# Altium PCB PCB1.pcbdoc
Units mil, origin at the board's own origin, x right, y up, seen from the top; angles counter-clockwise.
Board outline 6220 x 5760 mil, 2 copper layers (Top Layer, Bottom Layer); 105 components, 72 nets, 372 pads, 72 vias.
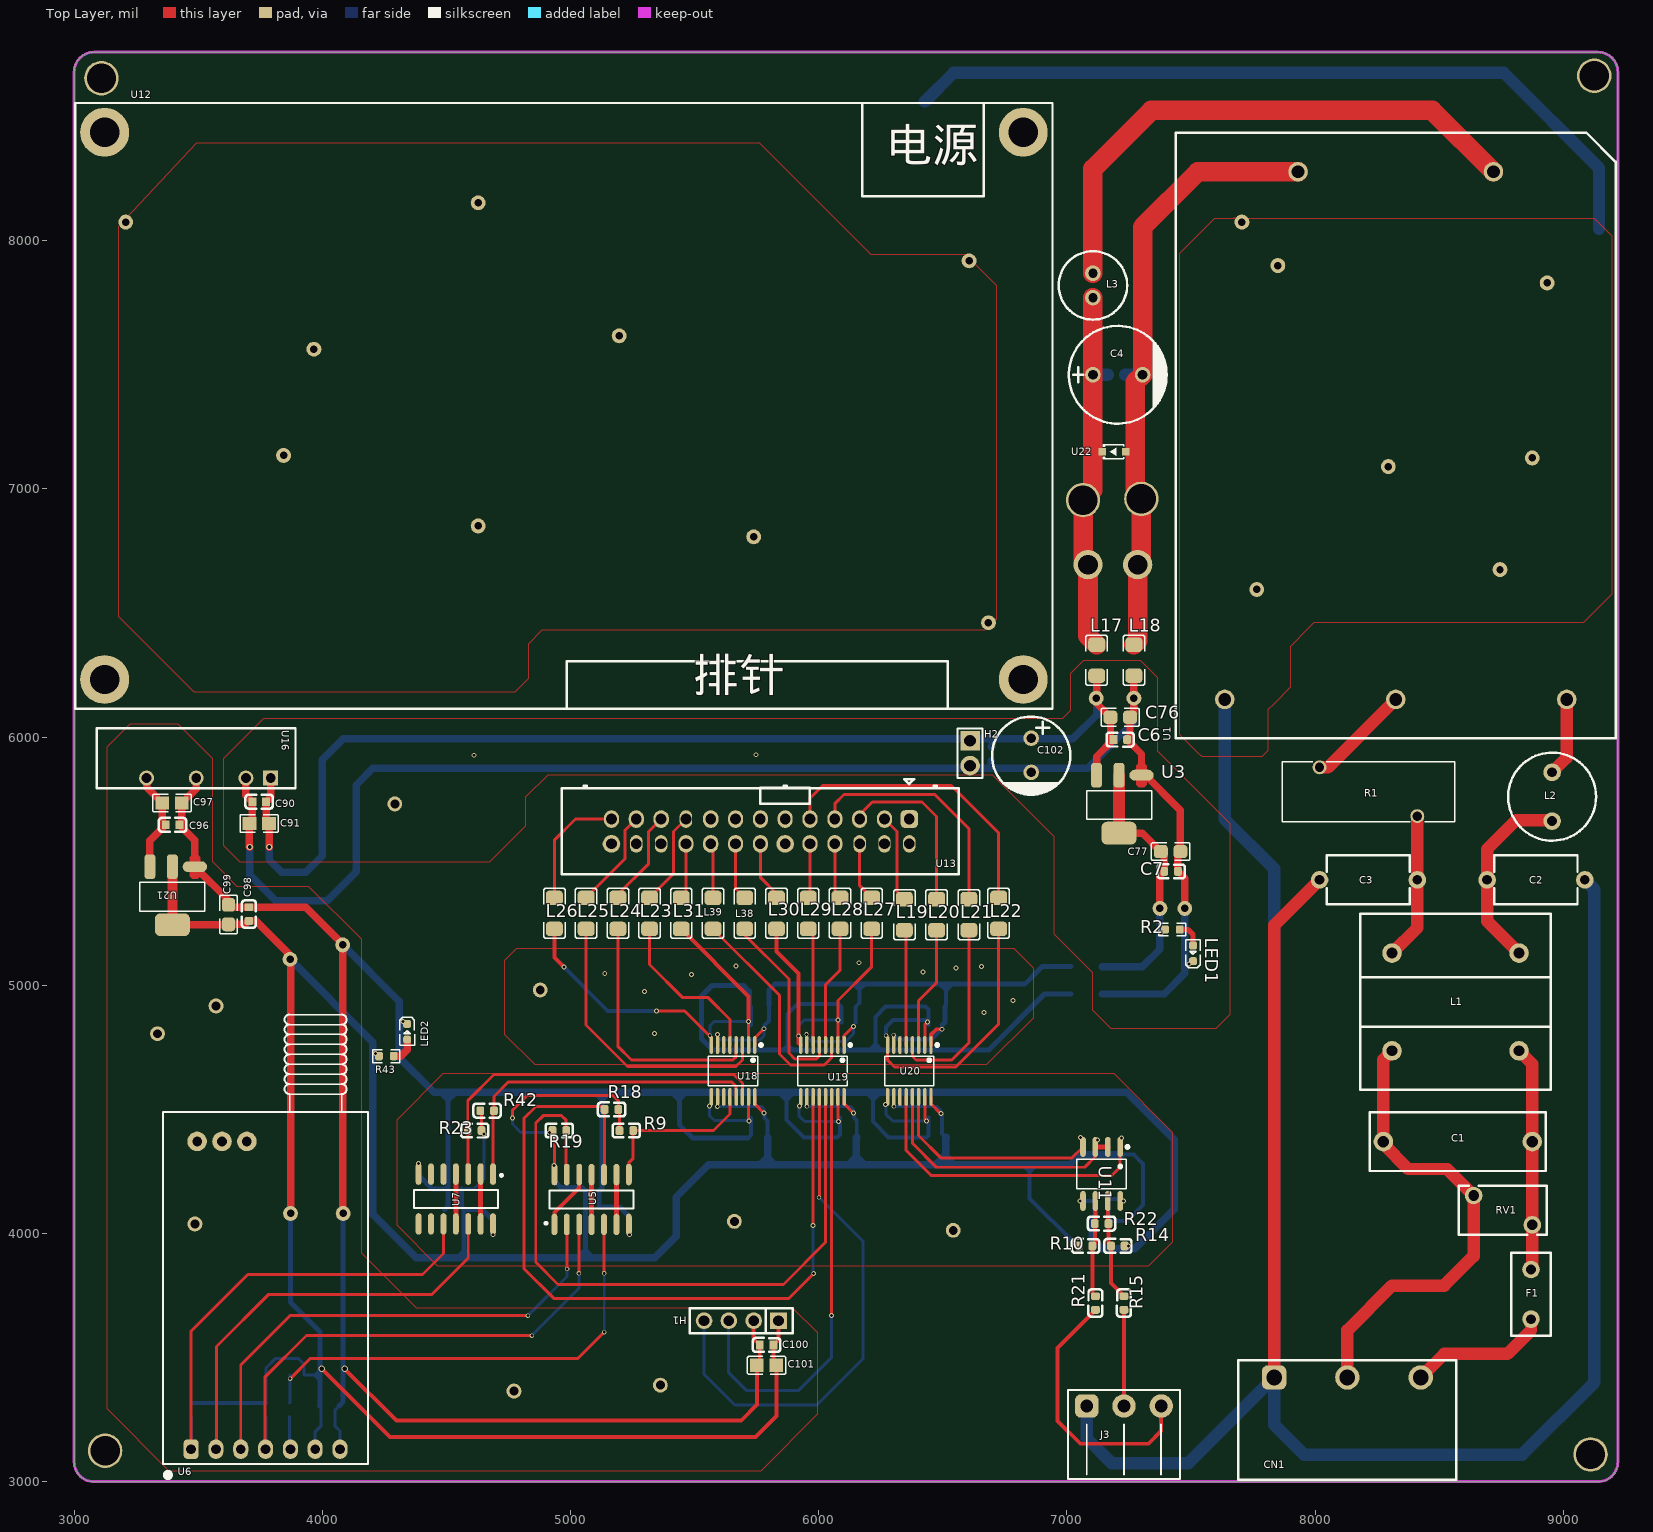
[diagram p0: Top Layer view]
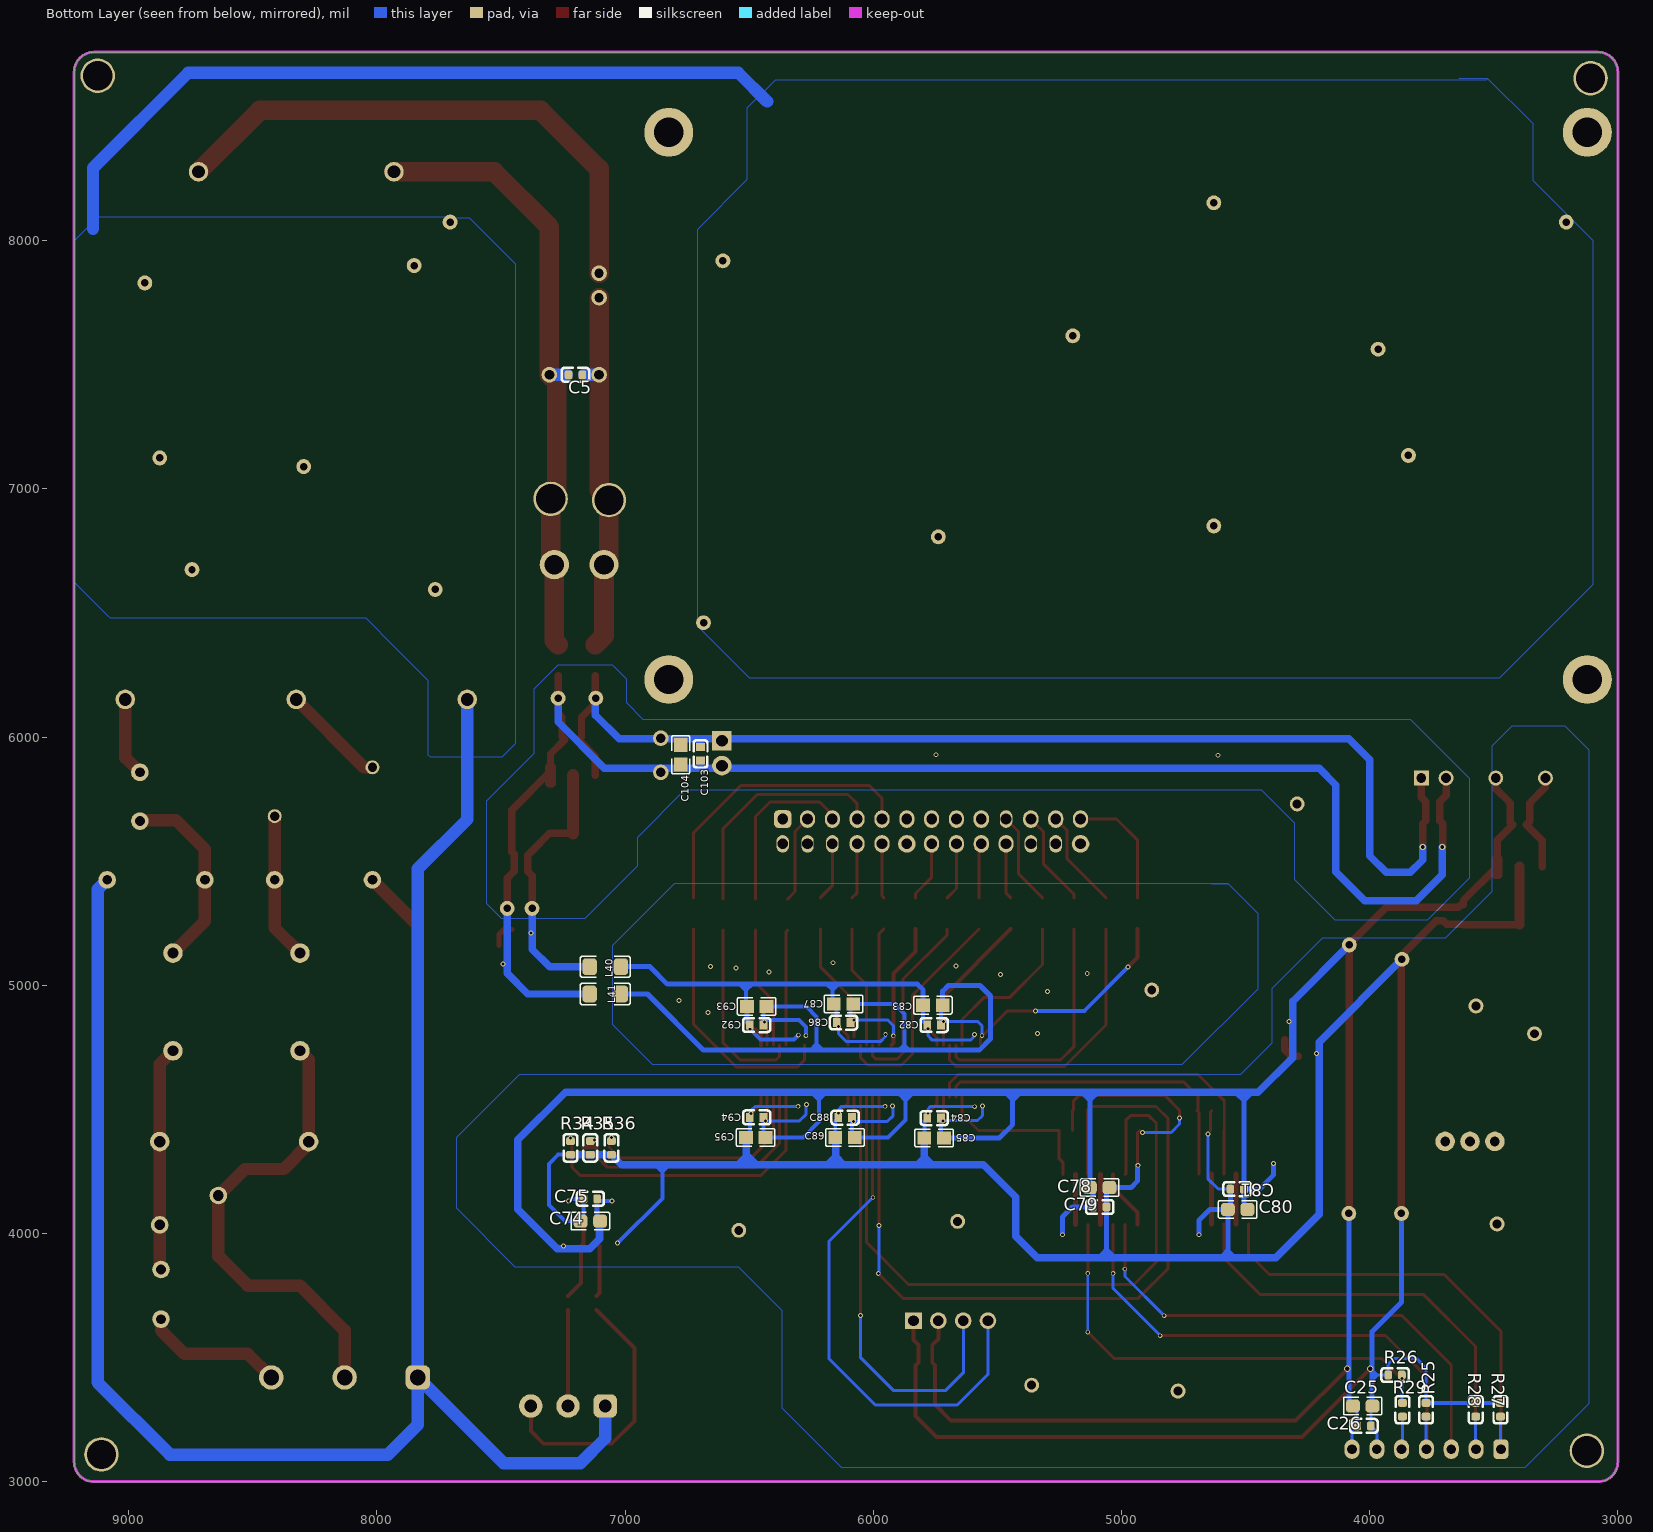
[diagram p1: Bottom Layer view, seen from below]

## Layer stack, top to bottom
Top Layer: signal copper (thickness not stored)
Dielectric: dielectric 12.6, FR-4, Dk 4.8
Bottom Layer: signal copper (thickness not stored)

## Board outline
3080,8760 9140,8760 cw(c9140,8680) 9220,8680 9220,3080 cw(c9140,3080) 9140,3000 3080,3000 cw(c3080,3080) 3000,3080 3000,8680 cw(c3080,8680)

## Components (designator, comment, footprint, x,y, rotation, side; value= is the part's Value field where it differs from the comment)
C1 "100nF" CAP-TH_L18.0-W6.0-P15.00-D1.2 8575,4370 r0 top
C2 "1nF" CAP-TH_L8.5-W5.0-P10.00-D0.6 8890,5425 r0 top
C3 "1nF" CAP-TH_L8.5-W5.0-P10.00-D0.6 8215,5425 r0 top
C4 "1000uF" CAP-TH_BD10.0-P5.00-D1.0-FD 7205,7460 r0 top
C5 "100nF" C0603#1 7200,7460 r180 bottom
C6 "100nF" C0603#2 7215,5990 r0 top
C7 "100nF" C0603#1 7420,5459 r180 top
C25 "10uf" C0805_2 4028,3305 r180 bottom
C26 "100nf" C0603#1 4023,3225 r180 bottom
C74 "10uf" C0805#1 7140,4050 r180 bottom
C75 "100nf" C0603#1 7140,4140 r180 bottom
C76 "10uF" C0805#1 7215,6080 r0 top
C77 "10uF" C0805#1 7418,5539 r180 top
C78 "10uf" C0805#1 5088,4185 r0 bottom
C79 "100nf" C0603#1 5088,4107 r0 bottom
C80 "10uf" C0805#1 4532,4097 r180 bottom
C81 "100nf" C0603#1 4534,4179 r180 bottom
C82 "CAP_0603" C0603#3 5755,4840 r0 bottom
C83 "CAP_0805" C0805#2 5760,4920 r0 bottom
C84 "CAP_0603" C0603#3 5755,4465 r0 bottom
C85 "CAP_0805" C0805#2 5755,4385 r0 bottom
C86 "CAP_0603" C0603#3 6120,4850 r0 bottom
C87 "CAP_0805" C0805#2 6120,4925 r0 bottom
C88 "CAP_0603" C0603#3 6114,4467 r0 bottom
C89 "CAP_0805" C0805#2 6114,4387 r0 bottom
C90 "CAP_0603" C0603#3 3745.77,5739.91 r0 top
C91 "CAP_0805" C0805#2 3745.77,5651.91 r0 top
C92 "CAP_0603" C0603#3 6470,4840 r0 bottom
C93 "CAP_0805" C0805#2 6470,4915 r0 bottom
C94 "CAP_0603" C0603#3 6470,4468 r0 bottom
C95 "CAP_0805" C0805#2 6474,4387 r0 bottom
C96 "CAP_0603" C0603#3 3396.43,5646.61 r180 top
C97 "CAP_0805" C0805#2 3394.43,5734.61 r180 top
C98 "100nF" C0603#1 3704,5287 r270 top
C99 "10uF" C0805#1 3622,5285 r270 top
C100 "CAP_0603" C0603#3 5790,3551 r0 top
C101 "CAP_0805" C0805#2 5790,3469 r0 top
C102 "ERS1VM221F12OT" CAP-TH_BD8.0-P3.50-D0.6-FD 6856,5927 r270 top
C103 "CAP_0603" C0603#3 6696,5933 r90 bottom
C104 "CAP_0805" C0805#2 6776,5929 r90 bottom
CN1 "KF2EDGRC-7.5-3P" CONN-TH_KF2EDGRC-7.5-3P 8130.27,3420 r0 top
F1 "2010T1A250V" FUSE-TH_L8.5-W4.0-P5.08-D0.6 8870,3755 r90 top
H1 "2.54-1*4P母" HDR-TH_4P-P2.54-V-F 5688,3649 r180 top
H2 "PZ254V-11-02P" HDR-TH_2P-P2.54-V-M 6610,5935 r270 top
J3 "15EDG-3P" 15EDG3.81-WI-3P 7230,3305 r0 top
L1 "UU10.5-10mH" FILTER-TH_4P-L19.5-W18.0-P10.00-D0.7-S13.00 8565.91,4933.15 r180 top
L2 "330uH" IND-TH_BD9.0-P5.00-D0.7 8955,5760 r90 top
L3 "100uH" IND-TH_BD7.0-P2.50-D0.7 7105,7820 r270 top
L17 "BLM31PG330SN1L" L1206 7120,6310 r270 top
L18 "BLM31PG330SN1L" L1206 7270,6310 r270 top
L19 "BLM31PG330SN1L" L1206 6345,5285 r90 top
L20 "BLM31PG330SN1L" L1206 6475,5285 r90 top
L21 "BLM31PG330SN1L" L1206 6605,5285 r90 top
L22 "BLM31PG330SN1L" L1206 6725,5290 r90 top
L23 "BLM31PG330SN1L" L1206 5318.57,5290 r90 top
L24 "BLM31PG330SN1L" L1206 5190.71,5290 r90 top
L25 "BLM31PG330SN1L" L1206 5062.86,5290 r90 top
L26 "BLM31PG330SN1L" L1206 4935,5290 r90 top
L27 "BLM31PG330SN1L" L1206 6213.57,5290 r270 top
L28 "BLM31PG330SN1L" L1206 6085.71,5290 r270 top
L29 "BLM31PG330SN1L" L1206 5957.86,5290 r270 top
L30 "BLM31PG330SN1L" L1206 5830,5290 r270 top
L31 "BLM31PG330SN1L" L1206 5446.43,5290 r270 top
L38 "BLM31PG330SN1L" L1206 5702.14,5290 r270 top
L39 "BLM31PG330SN1L" L1206 5574.29,5290 r270 top
L40 "BLM31PG330SN1L" L1206 7080,5075 r0 bottom
L41 "BLM31PG330SN1L" L1206 7080,4965 r180 bottom
LED1 "LED_0603-R" LED_0603 7508,5131 r90 top
LED2 "LED_0603-R" LED_0603 4342,4811 r270 top
R1 "NTC15D-15" RES-TH_L17.5-W6.0-P10.0-S5.0-D0.8 8215,5780 r180 top
R2 "1K" R0603 7425,5225 r0 top
R9 "10K" C0603#1 5225,4415 r0 top
R10 "3.3K" C0603#1 7075,3950 r180 top
R14 "3.3K" C0603#1 7205,3950 r180 top
R15 "10R" C0603#1 7230,3720 r90 top
R18 "10K" C0603#1 5165,4500 r180 top
R19 "10K" C0603#1 4955,4415 r0 top
R21 "10R" C0603#1 7115,3720 r90 top
R22 "27K" C0603#1 7140,4040 r0 top
R23 "10K" C0603#1 4614,4415 r180 top
R25 "10K" C0603#1 3773,3290 r90 bottom
R26 "10K" C0603#1 3898,3430 r0 bottom
R27 "10K" C0603#1 3473,3290 r90 bottom
R28 "10K" C0603#1 3573,3290 r90 bottom
R29 "100R" C0603#1 3868,3290 r90 bottom
R34 "10K" C0603#1 7220,4345 r90 bottom
R35 "10K" C0603#1 7140,4345 r90 bottom
R36 "10K" C0603#1 7055,4345 r90 bottom
R42 "10K" C0603#1 4664,4495 r0 top
R43 "1K" R0603 4258,4715 r0 top
RV1 "07D471K" RES-TH_L9.0-W5.0-P6.00-D0.7-S3.00 8756.89,4094.05 r180 top
U1 "TAS20-5-WH" PWRM-TH_TAS20-XX-WH 8325,7215 r90 top
U3 "AMS1117-3.3" SOT-223-3_L6.5-W3.4-P2.30-LS7.0-BR 7210,5730 r90 top
U5 "74HC14M/TR" SOIC-14 5085,4137 r90 top
U6 "WH-L102-L" WH-L102-L_Lib_V1.0 3358,3072 r0 top
U7 "74HC14M/TR" SOIC-14 4538,4139 r270 top
U11 "SP3485EEN" SOP-8_L5.0-W4.0-P1.27-LS6.0-BL 7140,4240 r180 top
U12 "Orangepi" orangePI 3005,8555 r0 top
U13 "26Pin芯片引脚" idc-th_x9555wv-2x13-ptv 5765,5620 r180 top
U16 "B0505LS-1WR3" PWRM-TH_BXXXXLS-1WR3 3542,5835 r180 top
U18 "CA-IS3742LB" SSOP-16_L4.9-W3.9-P0.64-LS6.0-BL 5655,4655 r180 top
U19 "CA-IS3742LB" SSOP-16_L4.9-W3.9-P0.64-LS6.0-BL 6015,4655 r180 top
U20 "CA-IS3742LB" SSOP-16_L4.9-W3.9-P0.64-LS6.0-BL 6365,4655 r180 top
U21 "AMS1117-3.3" SOT-223-3_L6.5-W3.4-P2.30-LS7.0-BR 3396,5361 r90 top
U22 "SS14" SOD-323_L1.7-W1.3-LS2.5-RD 7190,7150 r0 top

## Footprints (in the part's own frame and the unit in brackets; to place one, negate y for a bottom-side part, rotate by r counter-clockwise, add the part's x,y. Pads: shape width x height; smd on the part's side, far side on the other; paste and mask are expansions set on the pad)
15EDG3.81-WI-3P [mm]
  rrect50% 2.4x2.4 hole 1.3: 1(-3.81,0)
  round 2.4 hole 1.3: 2(0,0) 3(3.81,0)
  silkscreen extent -5.71,-7.49 5.71,1.65
C0603#1 [mm]
  rrect50% 0.8x0.9 smd: 1(-0.7,0) 2(0.7,0)
  silkscreen extent -1.41,-0.71 1.39,0.72
C0603#2 [mm]
  rect 0.8x0.9 smd: 1(-0.7,0)
  rrect50% 0.8x0.9 smd: 2(0.7,0)
  silkscreen extent -1.41,-0.71 1.39,0.72
C0603#3 [mm]
  rect 0.8x0.9 smd: 1(-0.7,0) 2(0.7,0)
  silkscreen extent -1.41,-0.71 1.39,0.72
C0805#1 [mm]
  rrect50% 1.41x1.35 smd: 1(-1,0) 2(1,0)
  silkscreen extent -1.96,-0.9 1.96,0.9
C0805#2 [mm]
  rect 1.41x1.35 smd: 1(-1,0) 2(1,0)
  silkscreen extent -1.96,-0.9 1.96,0.9
C0805_2 [mm]
  rrect50% 1.41x1.35 smd: 1(-1,0) 2(1,0)
  silkscreen extent -1.96,-0.9 1.96,0.9
CAP-TH_BD8.0-P3.50-D0.6-FD [mm]
  round 1.6 hole 1: 1(-1.75,0) 2(1.75,0)
  silkscreen extent -3.96,-4 4.04,4
CAP-TH_BD10.0-P5.00-D1.0-FD [mm]
  round 1.6 hole 1: 1(-2.54,0) 2(2.54,0)
  silkscreen extent -5,-5 5.08,5
CAP-TH_L8.5-W5.0-P10.00-D0.6 [mm]
  round 1.8 hole 1: 1(-5,0) 2(5,0)
  silkscreen extent -4.25,-2.5 4.25,2.5
CAP-TH_L18.0-W6.0-P15.00-D1.2 [mm]
  round 2 hole 1.2: 1(-7.62,0) 2(7.62,0)
  silkscreen extent -9,-3 9,3
CONN-TH_KF2EDGRC-7.5-3P [mm]
  rrect50% 2.5x2.5 hole 1.6: 1(-7.5,0)
  round 2.5 hole 1.6: 2(0,0) 3(7.5,0)
  silkscreen extent -11.15,-10.45 11.15,1.75
FILTER-TH_4P-L19.5-W18.0-P10.00-D0.7-S13.00 [mm]
  round 2 hole 1.1: 1(-6.5,5) 2(-6.5,-5) 3(6.5,-5) 4(6.5,5)
  silkscreen extent -9.75,-9 9.75,9
FUSE-TH_L8.5-W4.0-P5.08-D0.6 [mm]
  round 1.8 hole 1: 1(-2.54,0) 2(2.54,0)
  silkscreen extent -4.25,-2 4.25,2
HDR-TH_2P-P2.54-V-M [mm]
  rect 2x2 hole 1.2: 1(-1.27,0)
  round 2 hole 1.2: 2(1.27,0)
  silkscreen extent -2.54,-1.27 2.54,1.27
HDR-TH_4P-P2.54-V-F [mm]
  rect 1.7x1.7 hole 1.1: 1(-3.81,0)
  round 1.7 hole 1.1: 2(-1.27,0) 3(1.27,0) 4(3.81,0)
  silkscreen extent -5.29,-1.27 5.29,1.27
idc-th_x9555wv-2x13-ptv [mm]
  rrect50% 1.8x1.8 hole 1.1: 1(-15.24,-1.27)
  oval 1.546x1.8 hole 1.1: 2(-12.7,-1.27) 3(-10.16,-1.27) 4(-7.62,-1.27) 5(-5.08,-1.27) 6(-2.54,-1.27) 7(0,-1.27) 8(2.54,-1.27) 12(12.7,-1.27) 13(15.24,-1.27) 17(7.62,1.27) 18(5.08,1.27) 19(2.54,1.27) 20(0,1.27) 22(-5.08,1.27) 23(-7.62,1.27)
  oval 1.6x1.8 hole 1.1: 9(5.08,-1.27) 11(10.16,-1.27)
  oval 1.292x1.8 hole 1.1: 10(7.62,-1.27) 15(12.7,1.27) 16(10.16,1.27)
  round 1.8 hole 1.1: 14(15.24,1.27) 21(-2.54,1.27)
  oval 1.27x1.8 hole 1.1: 24(-10.16,1.27) 25(-12.7,1.27) 26(-15.24,1.27)
  silkscreen extent -20.31,-5.36 20.31,4.4
IND-TH_BD7.0-P2.50-D0.7 [mm]
  round 1.6 hole 0.95 copper offset 0,0: 1(-1.25,0)
  round 1.6 hole 0.95: 2(1.25,0)
  silkscreen extent -3.5,-3.5 3.5,3.5
IND-TH_BD9.0-P5.00-D0.7 [mm]
  round 1.8 hole 1: 1(-2.5,0) 2(2.5,0)
  silkscreen extent -4.5,-4.5 4.5,4.5
L1206 [mm]
  rrect50% 1.485x1.728 smd: 1(-1.593,0) 2(1.593,0)
  silkscreen extent -2.56,-1.09 2.56,1.09
LED_0603 [mil]
  rrect50% 31.5x31.5 smd: 1(-33.5,-0.4) 2(29.5,-0.2)
  silkscreen extent -61,-30 53,30
orangePI [mm]
  round 5 hole 3: 1(3,-3) 2(3,-59) 3(97,-3) 4(97,-59)
  silkscreen extent 0,-62 100,0
PWRM-TH_BXXXXLS-1WR3 [mil]
  rect 60x60 hole 39.37: 1(-250,0)
  round 60 hole 39.37: 2(-150,0) 4(50,0) 6(250,0)
  silkscreen extent -350,-200 450,40
PWRM-TH_TAS20-XX-WH [mm]
  round 2 hole 1.3: 1(-27,-17.5) 2(-27,0) 3(-27,17.5) 4(27,10) 8(27,-10)
  silkscreen extent -31,-22.5 31,22.5
R0603 [mil]
  rrect50% 31.75x34.02 smd: 1(-29.66,0) 2(29.66,0)
  silkscreen extent -55,-26 55,26
RES-TH_L9.0-W5.0-P6.00-D0.7-S3.00 [mm]
  round 1.8 hole 1.1: 1(-3,1.5) 2(3,-1.5)
  silkscreen extent -4.5,-2.51 4.5,2.5
RES-TH_L17.5-W6.0-P10.0-S5.0-D0.8 [mm]
  round 1.425 hole 0.95: 1(-5,2.5) 2(5,-2.5)
  silkscreen extent -8.83,-3.08 8.83,3.08
SOD-323_L1.7-W1.3-LS2.5-RD [mm]
  rect 0.8x0.8 smd: 1(-1.2,0) 2(1.2,0)
  silkscreen extent -1.1,-0.7 1,0.7
SOIC-14 [mm]
  oval 2.2x0.6 smd: 1(-2.552,3.81) 2(-2.552,2.54) 3(-2.552,1.27) 4(-2.552,0) 5(-2.552,-1.27) 6(-2.552,-2.54) 7(-2.552,-3.81) 8(2.552,-3.81) 9(2.552,-2.54) 10(2.552,-1.27) 11(2.552,0) 12(2.552,1.27) 13(2.552,2.54) 14(2.552,3.81)
  silkscreen extent -2.55,-4.3 0.93,4.78
SOP-8_L5.0-W4.0-P1.27-LS6.0-BL [mil]
  oval 22.6x80.14 smd: 1(-75,-108.97) 2(-25,-108.97) 3(25,-108.97) 4(75,-108.97) 5(75,108.97) 6(25,108.97) 7(-25,108.97) 8(-75,108.97)
  silkscreen extent -110,-115 99,60
SOT-223-3_L6.5-W3.4-P2.30-LS7.0-BR [mm]
  oval 1.1x2.5 smd: 1(2.97,-2.3)
  rrect50% 2.5x1.1 smd: 2(2.97,0) 3(2.97,2.3)
  rrect50% 2.34x3.6 smd: 4(-2.97,0)
  Top Layer region: 1.995,-1.75 3.945,-1.75 4.22,-2.025 4.22,-2.575 3.945,-2.85 1.995,-2.85 1.72,-2.575 1.72,-2.025
  silkscreen extent -1.57,-3.33 1.37,3.33
SSOP-16_L4.9-W3.9-P0.64-LS6.0-BL [mil]
  oval 14x71.45 smd: 1(-87.5,-104.52) 2(-62.5,-104.52) 3(-37.5,-104.52) 4(-12.5,-104.52) 5(12.5,-104.52) 6(37.5,-104.52) 7(62.5,-104.52) 8(87.5,-104.52) 9(87.5,104.52) 10(62.5,104.52) 11(37.5,104.52) 12(12.5,104.52) 13(-12.5,104.52) 14(-37.5,104.52) 15(-62.5,104.52) 16(-87.5,104.52)
  silkscreen extent -118,-110 100,60
WH-L102-L_Lib_V1.0 [mm]
  rrect50% 1.524x2 hole 1: 1(2.88,1.5)
  oval 1.543x2 hole 1: 2(5.42,1.5) 3(7.96,1.5) 4(10.5,1.5) 5(13.04,1.5) 6(15.58,1.5) 7(18.12,1.5)
  round 2 hole 1: 8(8.58,33) 9(6.04,33) 10(3.5,33)
  silkscreen extent 0,-1.27 21,45.97

## Free pads (board coordinates)
  round 138.74 hole 118.11: 0(3125,3125) 1(9125,8665) 2(9110,3110) 3(3110,8655) 5(7300,6960) 6(7065,6955)
  round 60 hole 30: 1(3870,5105) 1(4082,5163) 1(7118,6157) 1(7270,6157) 1(7375,5310) 1(7850,7900) 2(7475,5310) 2(8935,7830) 3(8875,7125) 4(8295,7090) 5(8745,6675) 6(7765,6595) 7(7705,8075) 21(3208,8075) 21(3844,7135) 21(3966,7563) 21(4628,6851) 21(4628,8153) 21(5196,7617) 21(5738,6807) 22(6606,7919) 23(6684,6461) 27(3872,4081) 28(4084,4081)
  round 118.11 hole 78.74: 1(7085,6695) 2(7285,6695)
  round 60 hole 36: 29(4878,4981) 30(3336,4805) 31(3572,4917) 32(3486.55,4038.7) 33(4772,3365) 34(5362,3389) 35(6542,4013) 36(5660,4049) 37(4292,5731)

## Via types
v1: diameter 20, hole 12, Top Layer to Bottom Layer, 52 vias
v2: diameter 18, hole 12, Top Layer to Bottom Layer, 15 vias
v3: diameter 25, hole 15, Top Layer to Bottom Layer, 2 vias
v4: diameter 25, hole 18, Top Layer to Bottom Layer, 2 vias
v5: diameter 16, hole 12, Top Layer to Bottom Layer, 1 vias

## Nets (pads, with @x,y where several pads share a name; then routed paths per layer and width w, separated by ;. In a path a pad name is that pad's centre, name@x,y a point inside that pad or via, vN(x,y) a via of type N, cw(c..) or ccw(c..) an arc to the next point about the centre after c; other vN are vias at no path point)
3.3V: C7.2 C77.2 L40.2 pad.1@7375,5310 R2.1 U3.2 U3.4 | length 1100.8
  Top Layer w30: U3.4 7304.56,5613.07 C77.2 7392.44,5525.19 C7.2 7375,5441.56 pad.1@7375,5310
  Top Layer w50: U3.4 U3.2
  Bottom Layer w30: L40.2 7304,5075 7375,5146 pad.1@7375,5310
  other v1: 7380,5210
3.3VA: C82.2 C83.2 C86.2 C87.2 C92.2 C93.2 L40.1 U18.1 U18.7 U19.1 U19.7 U20.1 U20.7 | length 2874.2
  Top Layer w12: U18.1 5742.5,4787.5 v1(5780,4825) ; U19.1 6102.5,4797.5 v1(6140,4835)
  Top Layer w16: U20.1 6452.5,4801.5 6474,4823 v1(6496,4823)
  Bottom Layer w12: v1(5592,4801) 5592,4795 5608,4779 5762,4779 5780,4797 v1(5780,4825) ; 5798,4981 5799.37,4981 5800,4981 ; 5799.37,4981.63 5800,4981 ; 5800.37,4980.63 5800,4981 ; 5801.37,4981 5800,4981 ; v2(5950.8,4802.16) 5950.8,4794.2 5972,4773 6108,4773 6140,4805 v1(6140,4835)
  Bottom Layer w16: v1(5780,4825) 5782.56,4827.56 C82.2 5799.37,4856.81 C83.2 ; 6141.18,5003.82 6162.82,4982.18 ; C86.2 6147.56,4913.19 C87.2 6163.8,4929.43 6163.8,5005 ; 6165.18,4982.18 6186.82,5003.82 ; v2(6301.54,4799) 6319.54,4781 6454,4781 v1(6496,4823) 6496,4838.44 C92.2 ; 6489.18,5003.82 6510.82,4982.18 ; C93.2 6512.89,4918.52 6512.89,4983.89 ; 6511.18,4982.18 6512.89,4983.89 ; 6512.89,5005 6512.89,4983.89 ; 6536.82,5003.82 6516.89,4983.89 6512.89,4983.89
  Bottom Layer w20: C83.2 5799.37,4981 5799.37,4981.63 5822.74,5005 6163.8,5005 6512.89,5005 6830,5005 6900,5075 L40.1 ; C92.2 6509.37,4851.81 C93.2
3.3VB: C25.2 C26.2 C74.1 C75.1 C78.1 C79.1 C80.1 C81.1 C84.2 C85.2 C88.2 C89.2 C94.2 C95.2 C98.2 C99.2 C100.2 C101.2 H1.1 pad.1@3870,5105 pad.27 R9.1 R10.2 R18.1 R19.1 R23.1 R25.2 R26.2 R27.2 R28.2 R34.1 R35.1 R36.1 R42.1 R43.1 U5.14 U6.6 U7.14 U11.8 U18.10 U18.16 U19.10 U19.16 U20.10 U20.16 U21.2 U21.4 | length 15761.3
  Top Layer w12: R42.1 4641.56,4489.88 R23.1 ; v1(4766,4465) 4766,4497 4826,4557 5170,4557 5192.56,4534.44 R18.1 5197.44,4495.12 R9.1 ; R19.1 4935,4407.44 U5.14 ; U18.16 5742.5,4522.5 v1(5780,4485) ; U19.16 6102.5,4522.5 v1(6140,4485) ; U20.16 6452.5,4522.5 v1(6492,4483)
  Top Layer w16: v4(3998,3455) 4272,3181 5746,3181 5830,3265 5830,3468.37 C101.2 5817.56,3480.81 C100.2 5838,3571.44 H1.1
  Top Layer w30: U21.4 3620.44,5244.07 C99.2 3690.19,5245.63 C98.2 3731.56,5259.44 3872,5119 pad.27
  Top Layer w40: U21.4 U21.2
  Bottom Layer w12: R25.2 3773,3458 3812,3497 3902,3497 3926,3473 R26.2@3926,3430.44 ; R26.2 R26.2@3926,3430.44 ; U6.6 3971.39,3200.95 C26.2 3995.44,3298.19 C25.2 3988.63,3411 3988.63,3430.44 3972.63,3430.44 R26.2@3926,3430.44 ; C81.1 4610,4179 4652,4221 v1(4652,4401) ; v1(4766,4465) 4766,4441 4800,4407 v1(4916,4407) ; v2(5592,4511) 5770.97,4511 5780,4501.97 v1(5780,4485) ; v2(5952.5,4512.32) 6126.68,4512.32 6140,4499 v1(6140,4485) ; v2(6302.5,4512.08) 6476.92,4512.08 6492,4497 v1(6492,4483)
  Bottom Layer w16: R27.2 R28.2 R25.2 ; 3975.63,3433.44 3972.63,3430.44 3972.63,3427 3988.63,3411 ; 3976.63,3434.44 3985.63,3443.44 ; v1(5780,4485) 5782.56,4482.44 C84.2 5794.37,4453.19 C85.2 ; v1(6140,4485) 6141.56,4483.44 C88.2 6153.37,4455.19 C89.2 ; v1(6492,4483) 6497.56,4477.44 C94.2 6497.56,4402.81 C95.2 ; 6832,4267 6850,4249 ; 6850,4277 6850,4249 ; 6851,4250 6869,4268 ; v1(7030,3961) 6850,4141 6850,4249 ; R34.1 7269.56,4317.44 7306,4281 7306,4115 7242,4051 7180.37,4051 C74.1 7167.56,4061.81 C75.1 7219.07,4140 v1(7228.04,4131.03)
  Bottom Layer w20: pad.27 3872,3723 3990,3605 3990,3306.37 C25.2 ; 4546,3905 4570,3929 ; C81.1 4561.56,4106.81 C80.1 ; 4571.37,3903.11 C80.1 ; 4576,3927 4600,3903 ; v1(4688,3995) 4688,4053 4644,4097 C80.1 ; 4693.26,3903 4693.37,3903.11 ; v1(4934,4275) 4936,4273 4936,4211 4962,4185 C78.1 5060.44,4173.19 C79.1 5060.44,3903.49 5059.95,3903 ; 5030,3905 5054,3929 ; 5064,3931 5088,3907
  Bottom Layer w30: pad.1@3870,5105 4204,4771 4204,4077 4378,3903 4600,3903 4693.26,3903 5059.95,3903 5340,3903 5426,3989 5426,4147 5556,4277 5764,4277 ; C85.2 5794.37,4307.37 5764,4277 ; 5794.81,4304.19 5822,4277 ; 6122,4279 6150,4307 ; 6152,4307 6152,4309 ; C89.2 6152,4385.63 6152,4309 ; C95.2 6512,4385.63 6512,4317 6508,4313 ; R34.1 R35.1 R36.1 7014.56,4277 6850,4277 6544,4277 ; 5764,4277 5822,4277 ; 5822,4277 6184,4277 ; 6152,4309 6184,4277 ; 6184,4277 6472,4277 ; 6472,4277 6508,4313 ; 6472,4277 6544,4277 ; 6508,4313 6544,4277
  other v1: 4214,4725
5V: C6.1 C76.1 C90.2 C91.2 C102.1 C103.2 C104.2 H2.1 L17.2 pad.1@7118,6157 U3.3 U16.1 | length 4742
  Top Layer w30: v3(3786,5557) 3786,5651.05 C91.2 3773.33,5663.72 C90.2 3792,5758.58 U16.1 ; U3.3 7119.45,5922.01 C6.1 7175.63,6001.81 C76.1 7120,6135.63 L17.2
  Bottom Layer w30: v3(3786,5557) 3786,5505 3836,5455 3934,5455 4000,5521 4000,5909 4084,5993 6699.6,5993 ; C103.2 6699.6,5964.16 6699.6,5993 ; pad.1@7120,6153 7120,6089 7024,5993 6699.6,5993
5VB: C96.2 C97.2 U16.6 U21.3 | length 415.2
  Top Layer w30: U16.6 3292,5797.67 C97.2 3355.06,5660.42 C96.2 3305.45,5583.19 U21.3
5VO: C4.1 C5.2 L3.2 L17.1 pad.1@7085,6695 pad.6@7065,6955 U22.1 | length 1497.4
  Top Layer w78.74: L3.2 C4.1 7105,6995 7065,6955 7065,6715 7085,6695 7085,6407.7 L17.1
  Bottom Layer w50: C4.1 C5.2@7165,7460
$1N3: C1.1 CN1.2 L1.4 RV1.2 | length 1907.3
  Top Layer w50: CN1.2 8130,3420.27 8130,3610 8310,3790 8520,3790 8638.78,3908.78 RV1.2 8531.89,4260 8375,4260 8275,4360 C1.1 8275,4701.3 L1.4
$1N4: CN1.3 F1.1 | length 568.2
  Top Layer w50: CN1.3 8520.55,3515 8775,3515 8870,3610 F1.1
$1N7: C1.2 F1.2 L1.1 RV1.1 | length 905.4
  Top Layer w50: L1.1 8875,4683.12 C1.2 RV1.1 8875,3860 F1.2
$1N18: C3.2 L1.3 R1.1 | length 593.8
  Top Layer w50: L1.3 8411.85,5231.85 C3.2 R1.1
$1N19: C2.1 L1.2 L2.1 | length 783.1
  Top Layer w50: L1.2 8693.15,5258.67 C2.1 8693.15,5548.15 8810,5665 8951.56,5665 L2.1
$1N23: L26.2 U13.13 | length 497.5
  Top Layer w12: L26.2 4935,5585 5020,5670 U13.13
$1N24: L25.2 U13.12 | length 401
  Top Layer w12: L25.2 5220,5509.84 5220,5625 U13.12
$1N25: L24.2 U13.11 | length 389.5
  Top Layer w12: L24.2 5190.71,5365.71 5315,5490 5315,5620 U13.11
$1N26: L23.2 U13.10 | length 378
  Top Layer w12: L23.2 5415,5449.13 5415,5620 U13.10
$1N27: L22.2 U13.5 | length 1205.5
  Top Layer w12: U13.5 5965,5754 6016,5805 6534,5805 6725,5614 L22.2
$1N28: L21.2 U13.4 | length 958.4
  Top Layer w12: U13.4 6065,5732 6102,5769 6468,5769 6605,5632 L21.2
$1N29: L20.2 U13.3 | length 705.9
  Top Layer w12: U13.3 6165,5688 6216,5739 6416,5739 6475,5680 L20.2
$1N30: L19.2 U13.2 | length 355.4
  Top Layer w12: U13.2 6315,5620 6315,5377.7 L19.2
$1N31: R1.2 U1.2 | length 420.2
  Top Layer w50: R1.2 8051.41,5878.42 U1.2
$1N32: L2.2 U1.1 | length 318
  Top Layer w50: L2.2 9013.97,5917.4 U1.1
$1N33: LED1.2 R2.2 | length 106.2
  Top Layer w20: R2.2 7488,5225 7508,5205 7508,5160.7 LED1.2
$1N35: L3.1 U1.8 | length 2234.1
  Top Layer w78.74: L3.1 7105,8290 7340,8525 8471.7,8525 U1.8
$1N37: L29.1 U13.22 | length 220.3
  Top Layer w12: L29.1 5965,5359.84 U13.22
$1N62: U7.4 U7.11 | length 200.9
  Top Layer w20: U7.11 U7.4
$1N63: U7.2 U7.13 | length 200.9
  Top Layer w20: U7.13 U7.2
$1N64: U5.1 U5.12 | length 242.4
  Top Layer w16: U5.1 4935,4084 5035,4184 U5.12
$1N65: U5.4 U5.11 | length 200.9
  Top Layer w20: U5.4 U5.11
$1N66: U5.6 U5.9 | length 200.9
  Top Layer w20: U5.6 U5.9
$1N71: R27.1 U6.1 U7.10 | length 1873
  Top Layer w12: U6.1 3471.39,3606.39 3700,3835 4404,3835 4488,3919 U7.10
  Bottom Layer w12: U6.1 3473,3132.67 R27.1
$1N72: R28.1 U6.2 U7.12 | length 1846.1
  Top Layer w12: U6.2 3574,3133.67 3574,3545 3784,3755 4442,3755 4588,3901 U7.12
  Bottom Layer w12: U6.2 3573,3132.67 R28.1
$1N74: U5.2 U6.3 | length 2011.6
  Top Layer w12: U6.3 3671.39,3470.39 3870,3669 v2(4828,3669) ; U5.2 4986,4035.53 v2(4986,3857)
  Bottom Layer w12: v2(4828,3669) 4986,3827 v2(4986,3857)
$1N75: R25.1 U5.3 U6.4 | length 2094
  Top Layer w12: U6.4 3770,3132.44 3770,3423 3936,3589 v2(4844,3589) ; v2(5034,3839) 5035,3840 U5.3
  Bottom Layer w12: U6.4 3773,3132.67 R25.1 ; v2(4844,3589) 5034,3779 v2(5034,3839)
$1N76: R26.1 R29.2 U5.5 | length 1890.7
  Top Layer w12: v2(3870.44,3415.29) 3952.15,3497 5030,3497 v2(5136,3603) ; U5.5 5135,3840 v2(5136,3839)
  Bottom Layer w12: R29.2 3870.44,3320 v2(3870.44,3415.29) R26.1 ; v2(5136,3603) v2(5136,3839)
$1N79: R10.1 R21.2 R22.1 U11.6 | length 393.8
  Top Layer w16: R21.2 7102.56,3760 R10.1 7112.44,3959.88 R22.1 7115,4042.56 U11.6
$1N80: R14.2 R15.2 R22.2 U11.7 | length 410.4
  Top Layer w16: U11.7 7165,4042.56 R22.2 7167.56,3959.88 R14.2 7177.44,3800.12 R15.2
$1N82: R29.1 U6.5 | length 132.8
  Bottom Layer w12: R29.1 3868,3134.44 U6.5
$1N2408: L31.1 U13.17 | length 225
  Top Layer w12: L31.1 5465,5371.27 U13.17
$1N2409: L30.1 U13.20 | length 244.2
  Top Layer w12: U13.20 5765,5435 5830,5370 L30.1
$1N2410: L27.1 U13.24 | length 237.4
  Top Layer w12: U13.24 6165,5401.27 L27.1
$1N11414: LED2.2 R43.2 | length 105.7
  Top Layer w30: R43.2 4316,4715 4342,4741 4342,4781.3 LED2.2
$1N11692: L39.1 U13.18 | length 221.1
  Top Layer w12: U13.18 5574.29,5560.71 L39.1
$1N11694: L38.1 U13.19 | length 232.7
  Top Layer w12: U13.19 5665,5389.84 L38.1
$1N11744: L28.1 U13.23 | length 225.9
  Top Layer w12: U13.23 6065,5373.41 L28.1
EARTH: C2.2 C3.1 CN1.1 J3.1 pad.1@7850,7900 pad.2@8935,7830 pad.3@8875,7125 pad.4 pad.5@8745,6675 pad.6@7765,6595 pad.7 pad.21 pad.22 pad.23 U1.3 | length 12823.2
  Top Layer w50: CN1.1 7835,5241.85 C3.1
  Bottom Layer w50: 6428,8561 6544,8677 8760,8677 9144,8293 9144,8049 ; J3.1 7080,3175 7180,3075 7490,3075 CN1.1 ; U1.3 7636.03,5668.97 7835,5470 CN1.1 ; C2.2 9125,5386.85 9125,3400 8834,3109 7956,3109 7835,3230 CN1.1
GND: C6.2 C7.1 C76.2 C77.1 C90.1 C91.1 C102.2 C103.1 C104.1 H2.2 L18.2 L41.1 LED1.1 pad.1@7270,6157 pad.2@7475,5310 pad.37 U3.1 U16.2 | length 6328.8
  Top Layer w30: U16.2 3692,5766.12 C90.1 3718.21,5663.72 C91.1 3706.4,5558.6 v3(3708,5557) ; L18.2 7270,6157 7270,6095.63 C76.2 7254.37,6001.81 C6.2 7300.55,5932.01 U3.1@7300.55,5862.5 ; U3.1 U3.1@7300.55,5862.5 ; pad.2@7475,5310 7475,5431.56 C7.1 7447.56,5529.19 C77.1 7457.37,5705.68 U3.1@7300.55,5862.5
  Bottom Layer w30: v3(3708,5557) 3708,5445 3812,5341 4020,5341 4136,5457 4136,5807 4204,5875 6696.74,5875 ; C103.1 6696,5875.74 6696.74,5875 ; L41.1 7392,4965 7475,5048 pad.2@7475,5310 ; pad.1@7270,6147 7270,6061 7084,5875 6696.74,5875
  other v1: 7492,5085 4612,5927 5748,5929
GNDA: C82.1 C83.1 C86.1 C87.1 C92.1 C93.1 L22.1 L26.1 L27.2 L30.2 L31.2 L41.2 pad.29 U18.2 U18.8 U19.2 U19.8 U20.2 U20.8 | length 7325.4
  Top Layer w12: v1(5346,4897) 5460,4897 5567.5,4789.5 U18.8 ; U18.2 5718,4760.02 v1(5718,4855) ; U19.2@6077.5,4792.5 v1(6077.5,4860.71) 6077.5,4938.5 6213.57,5074.57 L27.2 ; U20.8 6277.5,4715.8 6278,4715.3 6278,4698.32 6305.32,4671 6552,4671 6725,4844 L22.1 ; U20.2 6427.5,4842.5 v1(6438,4853)
  Top Layer w16: L26.1 4935,5112 v1(4974,5073) ; L31.2 5718,4955.73 v1(5718,4855) ; L30.2 5830,5137 5919.5,5047.5 v2(5919.5,4796.16) 5919.5,4767.52 U19.8
  Bottom Layer w12: v2(5562,4797) 5562,4837 5580,4855 v1(5718,4855) ; 5860,4747 5874,4761 ; 5879,4758 5893,4744 ; v2(5919.5,4796.16) 5919.5,4838.5 5941.71,4860.71 v1(6077.5,4860.71)
  Bottom Layer w16: v1(4974,5073) 5150,4897 v1(5346,4897) ; v1(5718,4855) C82.1@5727.44,4845.56 ; C83.1 5727.44,4913.19 C82.1@5727.44,4845.56 ; C82.1 C82.1@5727.44,4845.56 ; 5872.82,4739 5874,4740.18 5874,4761 5874,4885 5914,4925 C87.1 6092.44,4913.19 C86.1 ; 5956.35,4737.35 5958,4739 ; 5996.52,4737.01 5998.51,4739 ; 6206,4741 6226,4761 ; 6229.39,4739 6228,4740.39 6228,4873 6270,4915 C93.1 6442.44,4903.19 C92.1 ; 6232,4759 6252,4739 ; v2(6272,4797) 6272,4833 6300,4861 6430,4861 v1(6438,4853)
  Bottom Layer w20: C83.1 5720.63,4976.37 5698,4999 5570,4999 5528,4957 5528,4784.06 5573.06,4739 5872.82,4739 5958,4739 5998.51,4739 6229.39,4739 6252,4739 6684,4739 6910,4965 L41.2
  other v1: 5338,4805 6666,4891 6782,4939 5298,4975 5488,5043 5138,5047 6420,5053 6554,5069 6656,5075 5666,5077 6162,5091
GNDB: C25.1 C26.1 C74.2 C75.2 C78.2 C79.2 C80.2 C81.2 C84.1 C85.1 C88.1 C89.1 C94.1 C95.1 C96.1 C97.1 C98.1 C99.1 C100.1 C101.1 H1.2 LED2.1 pad.1@4082,5163 pad.28 pad.30 pad.31 pad.32 pad.33 pad.34 pad.35 pad.36 R14.1 U5.7 U6.7 U7.7 U11.5 U16.4 U18.9 U18.15 U19.9 U19.15 U20.9 U20.15 U21.1 | length 14053.1
  Top Layer w12: U18.15 5717.5,4455.5 v1(5720,4453) ; U19.15 6077.5,4453.5 v1(6080,4451) ; U20.15 6427.5,4459.5 v1(6434,4453)
  Top Layer w16: v4(4090,3455) 4298,3247 5688,3247 5752,3311 5752,3467.63 C101.1 5762.44,3480.81 C100.1 5738,3575.44 H1.2
  Top Layer w30: U16.4 3492,5792.81 C97.1 3433.8,5656.42 C96.1 3486.55,5584.05 U21.1 3622,5342.48 C99.1 ; C99.1@3632,5325 3642.44,5314.56 C98.1 3932.44,5314.56 4082,5165 pad.28@4082,4081
  Bottom Layer w12: C25.1 4050.56,3288.19 C26.1 4071.39,3204.17 U6.7 ; v1(5560,4513) 5560,4475 5580,4455 5718,4455 v1(5720,4453) ; v1(5922,4513) 5920,4511 5920,4475 5944,4451 v1(6080,4451) ; v1(6270,4519) 6272,4517 6272,4479 6298,4453 v1(6434,4453)
  Bottom Layer w16: C85.1 5727.44,4396.81 C84.1 ; 5864.43,4569 5870,4563.43 5870,4457 5940,4387 C89.1 6086.44,4398.81 C88.1 ; 6218,4569 6218,4451 6282,4387 C95.1 6442.44,4394.81 C94.1 ; v1(7052,4131) 7103.44,4131 C75.2
  Bottom Layer w20: C25.1 4084,3321.63 pad.28 ; v1(4388,4283) 4388,4235 4444,4179 C81.2 ; 4482.44,4561 4506.44,4537 C81.2 ; C80.2 4506.44,4110.81 C81.2 ; 4504.82,4569 4506.44,4567.38 4506.44,4539.44 ; 4509.75,4539.44 4532.31,4562 ; 5103.37,4561 5127.37,4537 ; 5130,4539 5154,4563 ; 5130.22,4569 5127.37,4566.15 5127.37,4537 ; v1(5238,3995) 5238,4067 5198,4107 C79.2 5115.56,4173.19 C78.2 5127.37,4537 ; 5414.51,4561 5438.51,4537 ; 5438,4539 5438.51,4539.51 ; 5438.51,4569 5438.51,4539.51 ; 5462,4563 5438.51,4539.51 ; C85.1 5492,4385 5438.51,4438.49 5438.51,4537 ; 5844.26,4564.74 5867.74,4541.26 ; 5870.26,4539.26 5893.74,4562.74 ; 6194.26,4566.74 6217.74,4543.26 ; 6220.26,4541.26 6243.74,4564.74 ; C74.2 7112.44,4061.81 C75.2 ; 5438.51,4537 5438.51,4539.51
  Bottom Layer w30: pad.1@4082,5163 4310,4935 4310,4709 4450,4569 4504.82,4569 5130.22,4569 5438.51,4569 5864.43,4569 6218,4569 7240,4569 7432,4377 7432,4097 7274,3939 7142,3939 7102,3979 7102,4048.63 C74.2
  other v1: 7248.14,3949.89 4326,4855
GNDO: C4.2 C5.1 L18.1 pad.2@7285,6695 pad.5@7300,6960 U1.4 U22.2 | length 2506.2
  Top Layer w78.74: L18.1 7285,6387.7 7285,6695 7300,6710 7300,6960 7275,6985 7275,7430 C4.2 7305,8055 7527.99,8277.99 U1.4
  Bottom Layer w50: C5.1@7235,7460 C4.2
GPIO1_C0: L24.1 U18.4 | length 1025.3
  Top Layer w12: L24.1 5190.71,4754.29 5246,4699 5654,4699 5667.5,4712.5 U18.4
GPIO1_C0_O: R42.2 U7.1 U18.13 | length 1365.9
  Top Layer w12: U7.1 4688,4487.44 R42.2@4695.56,4495 ; R42.2 4691.56,4552.56 4750,4611 5648.7,4611 5667.5,4592.2 U18.13
GPIO1_C1: L23.1 U18.5 | length 662.3
  Top Layer w12: L23.1 5318.57,5083.45 5452.02,4950 5555,4950 5642.5,4862.5 U18.5
GPIO1_C1_O: R9.2 U5.8 U18.12 | length 671.3
  Top Layer w12: U5.8 5235,4285.47 5252.56,4303.03 R9.2 5576,4415 5642.5,4481.5 U18.12
GPIO1_C2: L25.1 U18.3 | length 1157
  Top Layer w12: L25.1 5062.86,4840.14 5230,4673 5666,4673 5692.5,4699.5 U18.3
GPIO1_C2_O: R23.2 U7.3 U18.14 | length 1517.1
  Top Layer w12: U7.3 4586.44,4241.03 R23.2 4586,4415.44 4586,4535 4692,4641 5658,4641 5692.5,4606.5 U18.14
GPIO1_C6: L21.1 U20.4 | length 762.4
  Top Layer w12: U20.4 6377.5,4713.5 6392,4699 6536,4699 6605,4768 L21.1
GPIO1_C6_O: R35.2 U11.2 U11.3 U20.13 | length 1071.2
  Top Layer w12: U20.13 6377.5,4363.5 6474,4267 7072,4267 7115,4310 U11.3
  Top Layer w20: U11.3 U11.2
  other v1: 7124.25,4376.5
RS485_A: J3.3 R21.1 | length 1088.5
  Top Layer w16: R21.1 6962,3539.44 6962,3245 7054,3153 7328,3153 7380,3205 J3.3
RS485_B: J3.2 R15.1 | length 387.4
  Top Layer w16: J3.2 R15.1
UART0_RX: L29.2 U19.6 | length 475.9
  Top Layer w12: L29.2 5977.5,5207.66 U19.6
UART0_RX_O: R18.2 U5.10 U19.11 | length 3189.9
  Top Layer w12: U5.10 5137.44,4239.91 R18.2 5125.44,4512 4861,4512 4812,4463 4812,3859 4932,3739 5880,3739 v1(5980,3839) ; v1(5977.5,4031.5) U19.11
  Bottom Layer w12: v1(5977.5,4031.5) 5977.5,3841.5 v1(5980,3839)
UART0_TX: L28.2 U19.4 | length 491.9
  Top Layer w12: U19.4 6027.5,5002.5 6085.71,5060.71 L28.2
UART0_TX_O: R19.2 U5.13 U19.13 | length 2783.6
  Top Layer w12: U5.13 4982.56,4239.91 R19.2 4982.56,4456.44 4964,4475 4890,4475 4860,4445 4860,3885 4950,3795 5858,3795 6027.5,3964.5 U19.13
UART1_RX: L19.1 U20.5 | length 465.9
  Top Layer w12: L19.1 6352.5,5214.8 U20.5
UART1_RX_O: R34.2 U11.1 U20.12 | length 1216
  Top Layer w12: U20.12 6352.5,4334.5 6454,4233 7180,4233 7214,4267 7214,4347.97 U11.1
  other v1: 7220.11,4385.62
UART1_TX: L20.1 U20.3 | length 492.8
  Top Layer w12: U20.3 6402.5,4937.5 6475,5010 L20.1
UART1_TX_O: R36.2 U11.4 U20.14 | length 873.8
  Top Layer w12: U20.14 6402.5,4394.5 6492,4305 7021.03,4305 U11.4
  other v1: 7055.11,4387.53
UART4_RX: L38.2 U19.5 | length 755.9
  Top Layer w12: L38.2 5702.14,5202.86 5880,5025 5880,4727 5904,4703 5990.5,4703 6002.5,4715 U19.5
UART4_RX_O: H1.4 U19.12 | length 2113
  Top Layer w12: v5(6002,4145) 6002.5,4145.5 U19.12
  Bottom Layer w12: H1.4 5538,3433 5662,3309 5992,3309 6178,3495 6178,3969 v5(6002,4145)
UART4_TX: L39.2 U19.3 | length 906.6
  Top Layer w12: L39.2 5842,4959.59 5842,4723 5886,4679 6022,4679 6052.5,4709.5 U19.3
UART4_TX_O: H1.3 U19.14 | length 1760.7
  Top Layer w12: v1(6052.5,3669) U19.14
  Bottom Layer w12: H1.3 5636,3647 5636,3441 5710,3367 5918,3367 6052.5,3501.5 v1(6052.5,3669)
"": pad.0 pad.1@9125,8665 pad.2@9110,3110 pad.3@3110,8655 U6.8 U6.9 U6.10 U7.5 U7.6 U7.8 U7.9 U12.1 U12.2 U12.3 U12.4 U13.1 U13.6 U13.7 U13.8 U13.9 U13.14 U13.15 U13.16 U13.21 U13.25 U13.26 U18.6 U18.11 U20.6 U20.11

## Polygon pours and split planes (outlines as drawn)
EARTH on Bottom Layer (solid, pour order 0): 7705,8095 9125,8095 9195,8025 9220,8000 9220,7835 9220,6625 9085,6490 9075,6480 8775,6480 8045,6480 7930,6365 7795,6230 7795,5930 7785,5920 7600,5920 7495,5920 7480,5935 7440,5975 7440,6160 7440,7905 7615,8080 7625,8090 7705,8090
EARTH on Top Layer (solid, pour order 1): 7670,8090 9125,8090 9140,8075 9195,8020 9195,7970 9195,6575 9135,6515 9080,6460 9000,6460 7995,6460 7975,6440 7900,6365 7900,6225 7900,6200 7835,6135 7810,6110 7810,5950 7810,5945 7785,5920 7545,5920 7530,5935 7455,6010 7455,6075 7455,7950 7505,8000 7595,8090 7700,8090
EARTH on Top Layer (solid, remove dead copper, pour order 2): 3735,8395 5760,8395 6210,7945 6590,7945 6715,7820 6715,6475 6670,6430 4885,6430 4830,6375 4830,6235 4775,6180 3485,6180 3180,6485 3180,8058.93 3495,8395
EARTH on Bottom Layer (solid, remove dead copper, pour order 3): 3640,8655 3526,8655 3344,8473 3344,8243 3102,8001 3102,6613 3478,6237 6498,6237 6708,6447 6708,8047 6508,8247 6508,8535 6394,8649 3530,8649 3526,8653 3638,8653
GND on Top Layer (solid, remove dead copper, pour order 4): 3600,5913 3600,5565 3668,5497 4674,5497 4820,5643 4820,5759 4910,5849 6700,5849 6948,5601 6948,5207 7102,5053 7102,4901 7176,4827 7602,4827 7658,4883 7658,5651 7366,5943 7366,6239 7298,6307 7066,6307 7014,6255 7014,6107 6982,6075 3762,6075
GNDA on Top Layer (solid, remove dead copper, pour order 5): 6788,5147 6864,5071 6864,4867 6676,4679 4858,4679 4736,4801 4736,5101 4784,5149 6788,5149
GNDB on Top Layer (solid, remove dead copper, pour order 6): 4486,4643 4300,4457 4300,4035 4464,3871 7330,3871 7426,3967 7426,4407 7190,4643
GNDB on Top Layer (solid, remove dead copper, pour order 7): 3224,6051 3132,5959 3132,3295 3382,3045 5768,3045 5996,3273 5996,3599.27 5896.27,3699 4379.57,3699 4158.07,3920.5 4158.07,5184.93 3946,5397 3658,5397 3558,5497 3558,5913 3420,6051
GND on Bottom Layer (solid, remove dead copper, pour order 8): 3598,5835 3598,5432.22 3768.81,5261.41 4138.41,5261.41 4302,5425 4302,5653 4434,5785 6762,5785 6952,5595 6952,5479 7162,5269 7498,5269 7558,5329 7558,5743 7366,5935 7366,6194.86 7270,6290.86 7051.86,6290.86 6996,6235 6996,6141 6928,6073 3836,6073
GNDA on Bottom Layer (solid, remove dead copper, pour order 9): 4638,5409 4570,5409
GNDA on Bottom Layer (solid, remove dead copper, pour order 10): 4452,5291 4452,4985 4758,4679 6888,4679 7050,4841 7050,5161 6800,5411 4572,5411
GNDB on Bottom Layer (solid, remove dead copper, pour order 11): 3426,6045 3214,6045 3118,5949 3118,3315 3376,3057 6128,3057 6366,3295 6366,3689 6542,3865 7442,3865 7678,4101 7678,4387 7424,4641 4520,4641 4392,4769 4392,4989 4190,5191 3693.3,5191 3505.36,5378.95 3505.36,5965.64

## Keep-outs
Board Outline Layer:
  the board outline again, w12

## Text inside footprints (layer, text, board x,y; h text height)
U12: Top Silkscreen Layer "电源" at 6274.82,8320.08 h135.94; Top Silkscreen Layer "排针" at 5494.82,6185.08 h135.94